# Altium PCB Temperature Monitor & Display.PcbDoc
Units mil, origin at the board's own origin, x right, y up, seen from the top; angles counter-clockwise.
Board outline 3000 x 2000 mil, 2 copper layers (Top Layer, Bottom Layer), stack 21 mil thick; 61 components, 52 nets, 265 pads, 27 vias.
Unrouted connection lines stored in the file: 114.
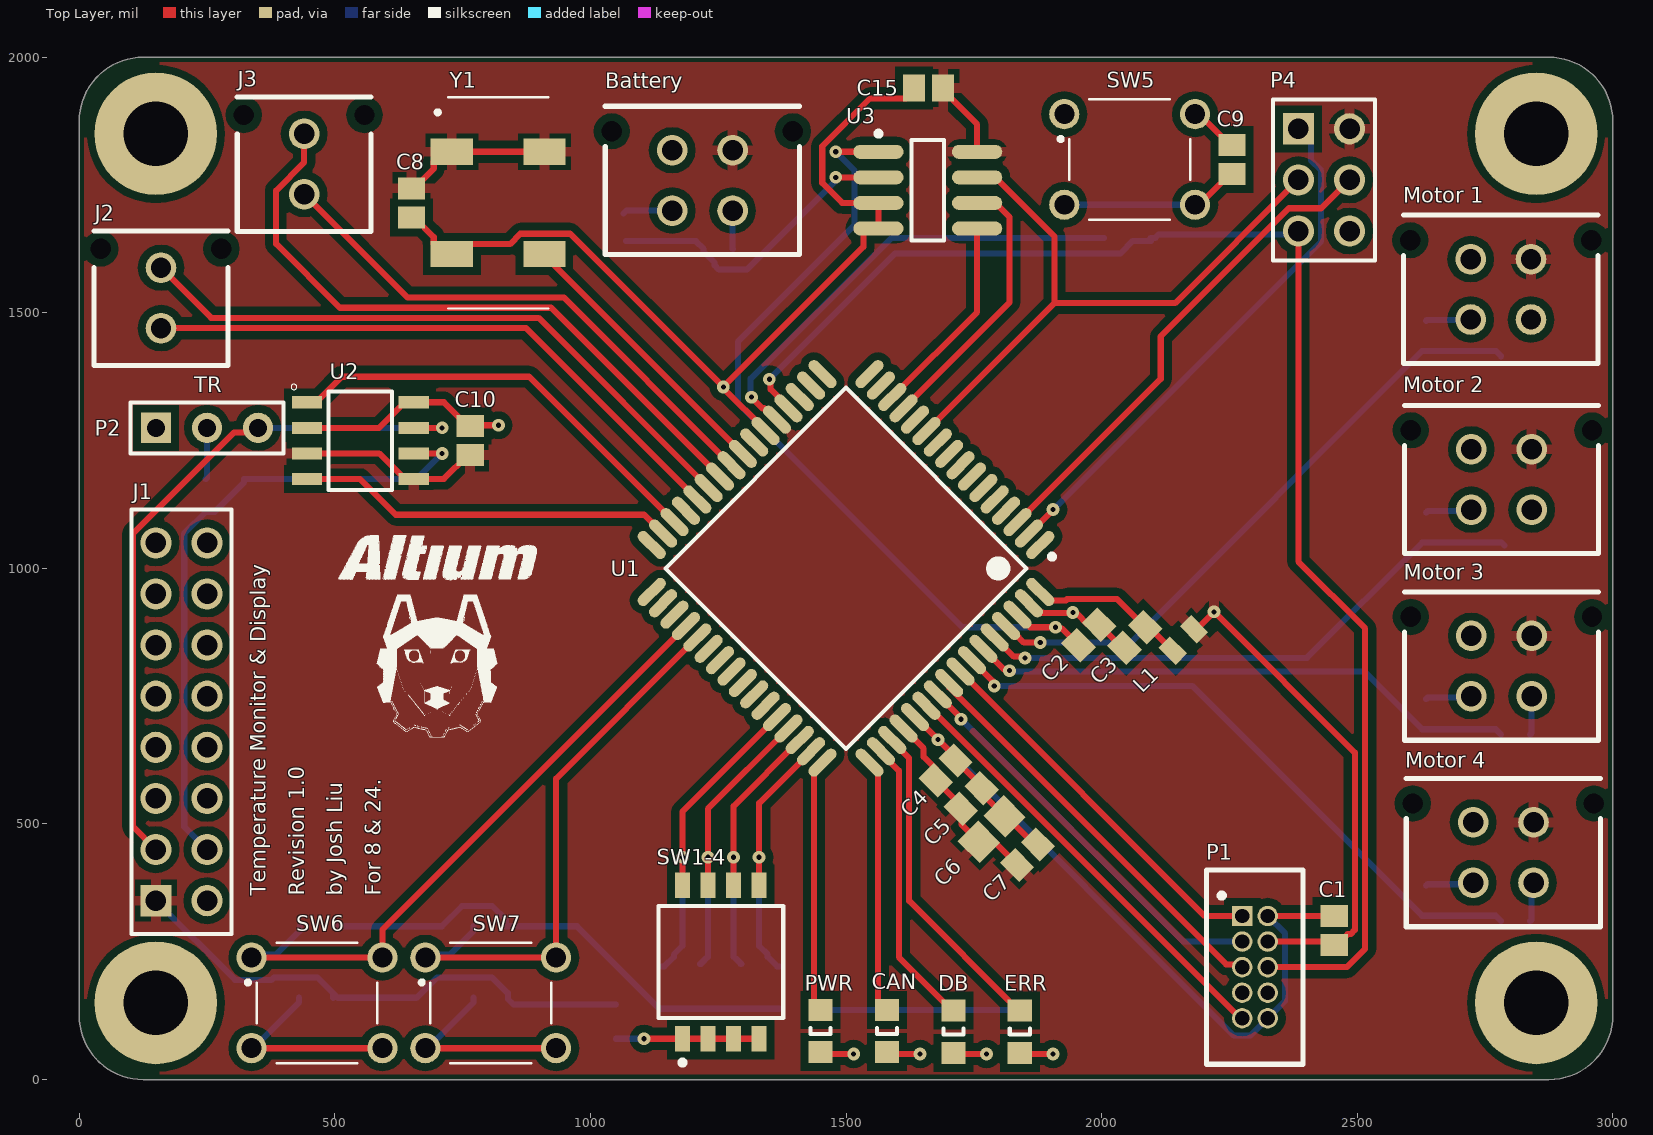
[diagram p0: Top Layer view]
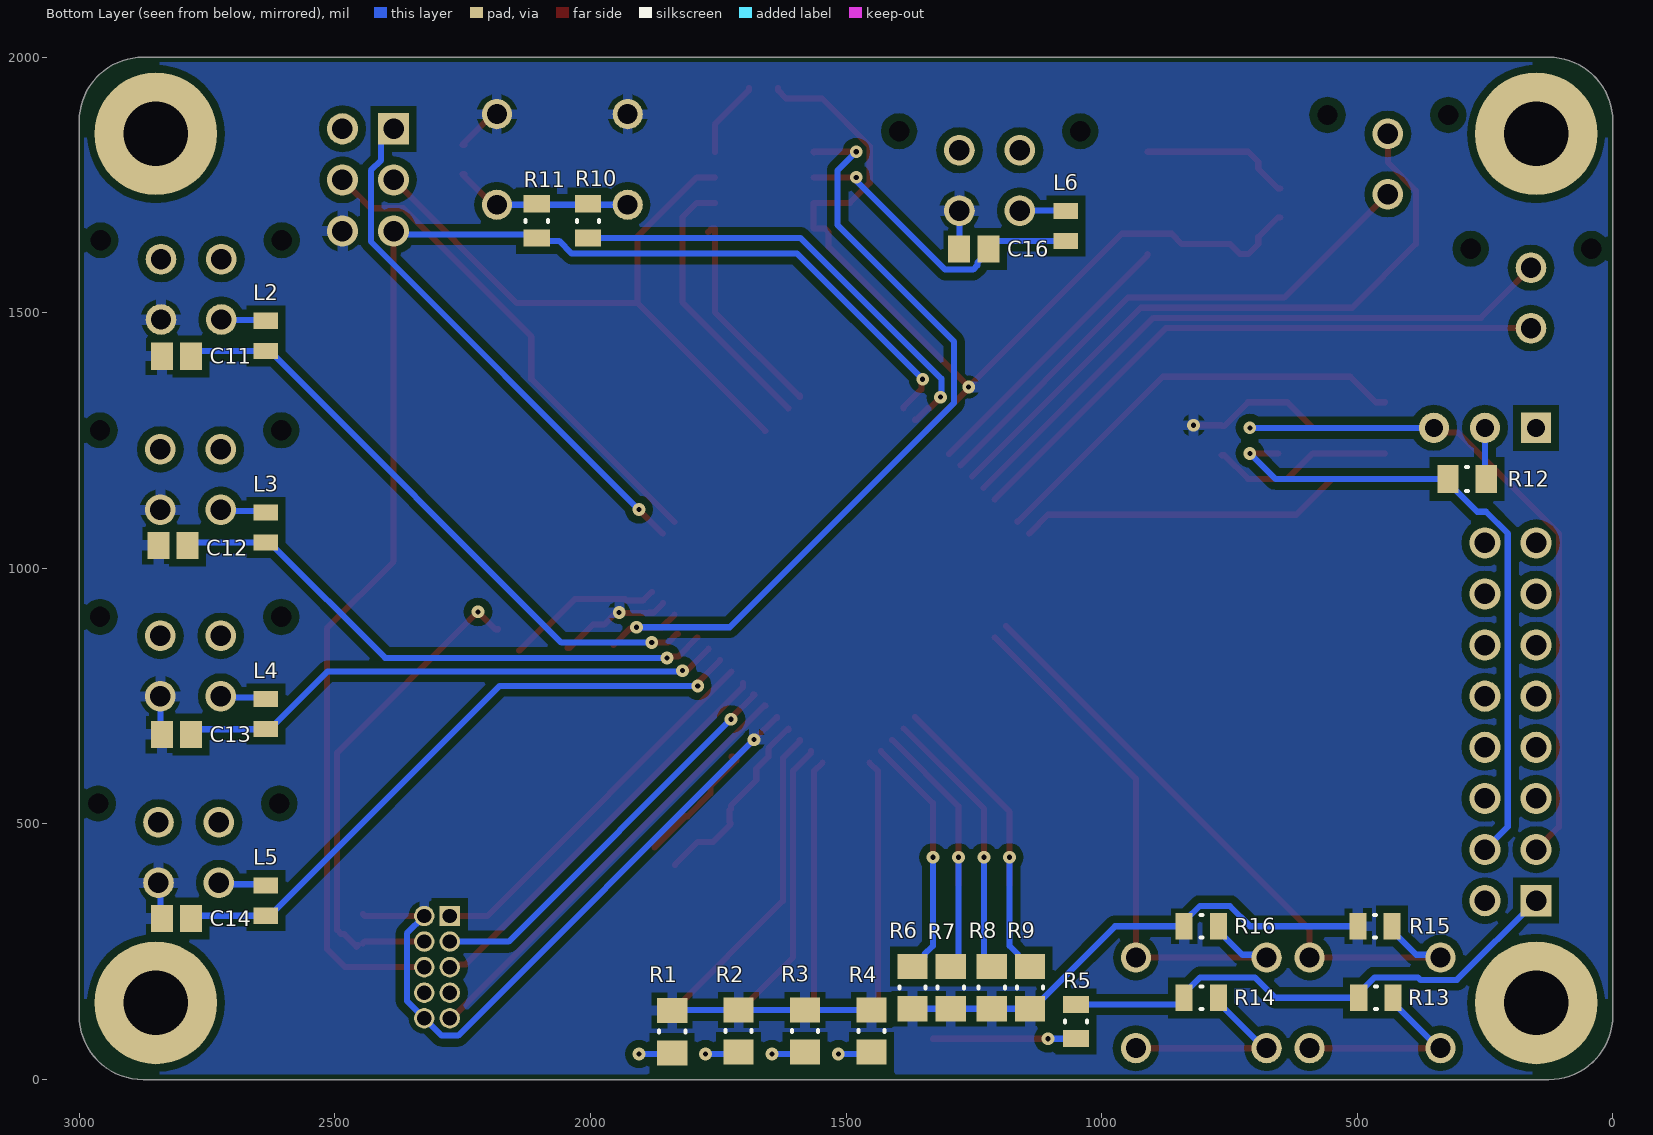
[diagram p1: Bottom Layer view, seen from below]

## Layer stack, top to bottom
Top Solder: solder mask 0.4, Solder Resist, Dk 3.5
Top Layer: signal copper 1.4
Dielectric 2: prepreg 2.8, PP-006, Dk 4.1
Dielectric 1: dielectric 12.6, FR-4, Dk 4.8
Dielectric 3: prepreg 2.8, PP-006, Dk 4.1
Bottom Layer: signal copper 1.4
Bottom Solder: solder mask 0.4, Solder Resist, Dk 3.5

## Board outline
125,0 2875,0 ccw(c2875,125) 3000,125 3000,1875 ccw(c2875,1875) 2875,2000 125.22,2000 ccw(c125,1875) 0,1875 0,125 ccw(c125,125)

## Design rules (kind name [scope] priority, off if disabled: settings)
BoardOutlineClearance [All] p1: gap=10 ignorepadtopadclearanceinfootprint=FALSE
Clearance [All] p1: gap=5 ignorepadtopadclearanceinfootprint=TRUE except(0: Arc-Hole Track-Hole SMDPad-Hole THPad-Hole Via-Hole Fill-Hole Poly-Hole Region-Hole Text-Hole; 8: Track-Track Track-SMDPad Track-THPad Track-Via; 10: Poly-Poly; 15: Arc-Poly Track-Poly SMDPad-Poly THPad-Poly Via-Poly Fill-Poly)
ComponentClearance [All] p1: gap=0 collisioncheckmode=3 verticalgap=100000 showdistances=FALSE
Height [All] p1: minheight=0 maxheight=2000 prefheight=500
HoleSize [All] p1: absolutevalues=TRUE maxlimit=200 minlimit=10 maxpercent=80.000 minpercent=20.000
MinimumAnnularRing [All] p1: minimumring=6
MinimumSolderMaskSliver [All] p1: minsoldermaskwidth=5
PlaneConnect [All] p1: planeconnectstyle=Relief reliefexpansion=20 reliefentries=4 reliefconductorwidth=20 reliefairgap=10
PolygonConnect [All] p1: connectstyle=Relief reliefconductorwidth=20 reliefentries=4 polygonreliefangle="90 Angle" airgapwidth=10
RoutingVias [All] p1: holewidth=10 width=25 viastyle="Through Hole" minholewidth=10 minwidth=25 maxholewidth=28 maxwidth=50
SilkToSolderMaskClearance [IsPad] p1: minsilkscreentomaskgap=5 clearancetoexposedcopper=TRUE
SolderMaskExpansion [All] p1: expansion=4
Width [All] p1: maxlimit=200 minlimit=5 preferedwidth=25 minimp=50.000000 maximp=50.000000 favimp=50.000000
24 further rules are at their usual default settings.

## Classes and differential pairs
component class U_TXD-RXD: J2
component class U_Reset: C9 R10 R11 SW5
component class "U_Power Supply Noise Canceller": C2 C3 C4 C5 C6 C7 L1
component class U_JTAG: C1 P1
component class U_ISCP: P4
component class "U_External ADC": Battery C15 C16 L6 U3
component class U_Display: J3
component class "U_Debug LEDs": CAN DB ERR PWR R1 R2 R3 R4
component class U_Debugger: R13 R14 R15 R16 SW6 SW7
component class U_Clock: C8 Y1
component class "U_CAN System": C10 J1 P2 R12 U2
component class "U_CAN Address Switch Array": R5 R6 R7 R8 R9 SW1-4
component class "U_Analog Input Noise Canceller": C11 C12 C13 C14 L2 L3 L4 L5 "Motor 1" "Motor 2" "Motor 3" "Motor 4"
component class "Top Level": U1

## Components (designator, comment, footprint, x,y, rotation, side; value= is the part's Value field where it differs from the comment)
Battery "Molex Micro" 0430450427 1219.06,1759.06 r180 top
C1 "0.1uF" CAPC2013X94X50LL20T25 2455,291.46 r90 top
C2 "0.1uF" CAPC2013X94X50LL20T25 1975,870 r225 top
C3 "0.1uF" CAPC2013X94X50LL20T25 2065,865 r45 top
C4 "0.01uF" CAPC2013X88X50LL20T25 1695,605 r225 top
C5 "0.1uF" CAPC2013X94X50LL20T25 1745,550 r225 top
C6 "1uF" CAPC2013X145X50ML20T25 1785,490 r225 top
C7 "10uF" CAPC2013X145X50LL20T20 1855,440 r225 top
C8 "0.1uF" CAPC2013X94X50LL20T25 650,1715 r270 top
C9 "0.1uF" CAPC2013X94X50LL20T25 2255,1800 r270 top
C10 "0.1uF" CAPC2013X94X50LL20T25 765,1250 r270 top
C11 "0.1uF" CAPC2013X94X50LL20T25 2810,1415 r180 bottom
C12 "0.1uF" CAPC2013X94X50LL20T25 2816.46,1045 r180 bottom
C13 "0.1uF" CAPC2013X94X50LL20T25 2810,675 r180 bottom
C14 "0.1uF" CAPC2013X94X50LL20T25 2810,315 r180 bottom
C15 "0.1uF" CAPC2013X94X50LL20T25 1661.46,1940 r0 top
C16 "0.1uF" CAPC2013X94X50LL20T25 1250,1625 r180 bottom
CAN "150080BS75000" 0805_A 1580,95 r90 top
DB "150080GS75000" 0805_A 1710,93.66 r90 top
ERR "150080RS75000" 0805_A 1840,93.66 r90 top
J1 "SSQ-108-02-G-D" SMTC-SSQ-108-02-X-D 150,350 r90 top
J2 "Molex micro-" 0430450227 160,1470 r0 top
J3 "Molex micro-" 0430450227 440,1731.89 r0 top
L1 "10uH" TDK-IND0805-125_V 2160,860 r225 top
L2 "10uH" TDK-IND0805-125_V 2635,1455 r90 bottom
L3 "10uH" TDK-IND0805-125_V 2635,1080 r90 bottom
L4 "10uH" TDK-IND0805-125_V 2635,715 r90 bottom
L5 "10uH" TDK-IND0805-125_V 2635,350 r90 bottom
L6 "10uH" TDK-IND0805-125_V 1070,1670 r270 bottom
"Motor 1" "Molex Micro" 0430450427 2780.94,1545.94 r180 top
"Motor 2" "Molex Micro" 0430450427 2782.17,1173.94 r180 top
"Motor 3" "Molex Micro" 0430450427 2782.17,808.94 r180 top
"Motor 4" "Molex Micro" 0430450427 2785.94,444.06 r180 top
P1 "SAMTEC-FTSH-105-01-X-D" SAMTEC-FTSH-105-01-X-D 2183.23,415.28 r270 top
P2 "Header 3" HDR1X3 150,1275 r0 top
P4 "TSW-103-08-L-D" SMTC-TSW-103-08-X-D 2385,1860 r270 top
PWR "150080YS75000" 0805_A 1450,95 r90 top
R1 "560R" RESC0805(2012)_M 1840,93.66 r90 bottom value="560.00 Ohm"
R2 "560R" RESC0805(2012)_M 1710,95 r90 bottom value="560.00 Ohm"
R3 "560R" RESC0805(2012)_M 1580,95 r90 bottom value="560.00 Ohm"
R4 "560R" RESC0805(2012)_M 1450,95 r90 bottom value="560.00 Ohm"
R5 "100R" RESC0805(2012)_L 1050,113.46 r90 bottom value="100.00 Ohm"
R6 "1K" RESC0805(2012)_M 1370,180 r90 bottom value="1000.00 Ohm"
R7 "1K" RESC0805(2012)_M 1295,180 r90 bottom value="1000.00 Ohm"
R8 "1K" RESC0805(2012)_M 1215,180 r90 bottom value="1000.00 Ohm"
R9 "1K" RESC0805(2012)_M 1140,180 r90 bottom value="1000.00 Ohm"
R10 "10K" RESC0805(2012)_L 2005,1680 r270 bottom value="10200.00 Ohm"
R11 "100R" RESC0805(2012)_L 2105,1680 r270 bottom value="100.00 Ohm"
R12 "120R" RESC0805(2012)_N 285,1175 r0 bottom value="120.00 Ohm"
R13 "100R" RESC0805(2012)_L 463.46,160 r180 bottom value="100.00 Ohm"
R14 "100R" RESC0805(2012)_L 805,160 r180 bottom value="100.00 Ohm"
R15 "10K" RESC0805(2012)_L 465,300 r0 bottom value="10200.00 Ohm"
R16 "10K" RESC0805(2012)_L 805,300 r180 bottom value="10200.00 Ohm"
SW1-4 "TDA04H0SB1" CKCP-TDA04H0SB1R_V 1255,230 r90 top
SW5 "1825910-7" "Switch 6mm 24V (NO)" 2055,1800 r0 top
SW6 "1825910-7" "Switch 6mm 24V (NO)" 465,150 r0 top
SW7 "1825910-7" "Switch 6mm 24V (NO)" 805,150 r0 top
U1 "AT90CAN32-16AU" 64A_N 1500,1000 r225 top
U2 "MCP2562-E/SN" SOIC127P600X175-8N 550,1250 r0 top
U3 "MCP3001-I/SN" SOIC-SN8_M 1660,1740 r0 top
Y1 "SG-636PCW_50.0000MC3__ROHS" SG-636 819.45,1715 r270 top

## Footprints (in the part's own frame and the unit in brackets; to place one, negate y for a bottom-side part, rotate by r counter-clockwise, add the part's x,y. Pads: shape width x height; smd on the part's side, far side on the other; paste and mask are expansions set on the pad)
64A_N [mm] "Thin QFP, 64-Leads, Body 14x14mm, Pitch 0.8mm, IPC Medium Density"
  oval 1.75x0.55 smd: 1(-7.65,6) 2(-7.65,5.2) 3(-7.65,4.4) 4(-7.65,3.6) 5(-7.65,2.8) 6(-7.65,2) 7(-7.65,1.2) 8(-7.65,0.4) 9(-7.65,-0.4) 10(-7.65,-1.2) 11(-7.65,-2) 12(-7.65,-2.8) 13(-7.65,-3.6) 14(-7.65,-4.4) 15(-7.65,-5.2) 16(-7.65,-6) 33(7.65,-6) 34(7.65,-5.2) 35(7.65,-4.4) 36(7.65,-3.6) 37(7.65,-2.8) 38(7.65,-2) 39(7.65,-1.2) 40(7.65,-0.4) 41(7.65,0.4) 42(7.65,1.2) 43(7.65,2) 44(7.65,2.8) 45(7.65,3.6) 46(7.65,4.4) 47(7.65,5.2) 48(7.65,6)
  oval 0.55x1.75 smd: 17(-6,-7.65) 18(-5.2,-7.65) 19(-4.4,-7.65) 20(-3.6,-7.65) 21(-2.8,-7.65) 22(-2,-7.65) 23(-1.2,-7.65) 24(-0.4,-7.65) 25(0.4,-7.65) 26(1.2,-7.65) 27(2,-7.65) 28(2.8,-7.65) 29(3.6,-7.65) 30(4.4,-7.65) 31(5.2,-7.65) 32(6,-7.65) 49(6,7.65) 50(5.2,7.65) 51(4.4,7.65) 52(3.6,7.65) 53(2.8,7.65) 54(2,7.65) 55(1.2,7.65) 56(0.4,7.65) 57(-0.4,7.65) 58(-1.2,7.65) 59(-2,7.65) 60(-2.8,7.65) 61(-3.6,7.65) 62(-4.4,7.65) 63(-5.2,7.65) 64(-6,7.65)
  silkscreen extent -7.77,-6.35 6.35,6.95, body extent -7,-7 7,7, height 1.6
0805_A [mm] "Chip LED, 2-Leads, Body 2.0x1.3mm, IPC Medium Density"
  rect 1.1x1.2 smd: 1(-1.05,0) 2(1.05,0)
  silkscreen extent -0.15,-0.5 0.15,0.5, body extent -1,-0.62 1,0.63, height 0.68
0430450227 [mil] "Molex Micro fit 3.0"
  round 60 hole 40: 1(0,0) 2(0,118.11)
  round 0 hole 40 unplated: ""(-118.11,155.12) ""(118.11,155.12)
  silkscreen extent -131,-73 131,190
0430450427 [mil] "Molex micro-fit 3.0 4 pos"
  round 60 hole 40: 1(-59.06,59.06) 2(-59.06,-59.06) 3(59.06,59.06) 4(59.06,-59.06)
  round 0 hole 40 unplated: 7(177.17,-96.06) ""(-177.17,-96.06)
  silkscreen extent -190,-145 190,145
CAPC2013X88X50LL20T25 [mm] "Chip Capacitor, 2-Leads, Body 2.2x1.45mm, IPC High Density"
  rect 1.067x1.35 smd: 1(-0.7,0) 2(0.7,0)
  body extent -1.1,-0.72 1.1,0.73, height 0.88
CAPC2013X94X50LL20T25 [mm] "Chip Capacitor, 2-Leads, Body 2.21x1.45mm, IPC High Density"
  rect 1.092x1.35 smd: 1(-0.725,0) 2(0.725,0)
  body extent -1.1,-0.72 1.1,0.72, height 0.94
CAPC2013X145X50LL20T20 [mm] "Chip Capacitor, 2-Leads, Body 2.00x1.25mm, IPC High Density"
  rect 1.05x1.35 smd: 1(-0.725,0) 2(0.725,0)
  body extent -1.1,-0.72 1.1,0.72, height 1.45
CAPC2013X145X50ML20T25 [mm] "Chip Capacitor, 2-Leads, Body 2.00x1.25mm, IPC Low Density"
  rect 1.448x1.55 smd: 1(-0.9,0) 2(0.9,0)
  body extent -1.1,-0.72 1.1,0.72, height 1.45
CKCP-TDA04H0SB1R_V [mm] "SMD, 8-Leads, Body 6.21x6.2mm, Pitch 1.27mm"
  rect 1.27x0.76 smd: 1(-3.81,1.905) 2(-3.81,0.635) 3(-3.81,-0.635) 4(-3.81,-1.905) 5(3.81,-1.905) 6(3.81,-0.635) 7(3.81,0.635) 8(3.81,1.905)
  silkscreen extent -5.12,-3.11 2.78,3.11, body extent -4.06,-3.1 4.06,3.11, height 2.3
HDR1X3 [mm] "Connector; Header; 3 Position"
  rect 1.5x1.5 hole 0.9: 1(0,0)
  round 1.5 hole 0.9: 2(2.54,0) 3(5.08,0)
  silkscreen extent -1.27,-1.27 6.35,1.27
RESC0805(2012)_L [mm] "Chip Resistor, Body 2.0x1.3mm, IPC High Density"
  rect 0.85x1.3 smd: 1(-0.85,0) 2(0.85,0)
  silkscreen extent -0.05,-0.55 0.05,0.55, body extent -1.1,-0.67 1.1,0.68, height 0.7
RESC0805(2012)_M [mm] "Chip Resistor, Body 2.0x1.3mm, IPC Low Density"
  rect 1.25x1.5 smd: 1(-1.05,0) 2(1.05,0)
  silkscreen extent -0.05,-0.65 0.05,0.65, body extent -1.1,-0.67 1.1,0.67, height 0.7
RESC0805(2012)_N [mm] "Chip Resistor, Body 2.0x1.3mm, IPC Medium Density"
  rect 1.05x1.4 smd: 1(-0.95,0) 2(0.95,0)
  silkscreen extent -0.05,-0.6 0.05,0.6, body extent -1.1,-0.67 1.1,0.68, height 0.7
SAMTEC-FTSH-105-01-X-D [mil]
  rect 40x40 hole 28 mask+3: 1(95.28,91.77)
  round 40 hole 28 mask+3: 2(95.28,141.77) 3(145.28,91.77) 4(145.28,141.77) 5(195.28,91.77) 6(195.28,141.77) 7(245.28,91.77) 8(245.28,141.77) 9(295.28,91.77) 10(295.28,141.77)
  silkscreen extent 5,22 385,211
SG-636 [mm]
  rect 1.3x2.1 smd: 1(-2.54,-2.3) 2(2.54,-2.3) 3(2.54,2.3) 4(-2.54,2.3)
  silkscreen extent -5.25,-3.1 5.25,2.5
SMTC-SSQ-108-02-X-D [mm] "SQ Post Socket, 2x8 Pins, Vertical, 2.54mm Pitch, Female"
  rect 1.55x1.55 hole 1.02: 1(0,0)
  round 1.55 hole 1.02: 2(0,-2.54) 3(2.54,0) 4(2.54,-2.54) 5(5.08,0) 6(5.08,-2.54) 7(7.62,0) 8(7.62,-2.54) 9(10.16,0) 10(10.16,-2.54) 11(12.7,0) 12(12.7,-2.54) 13(15.24,0) 14(15.24,-2.54) 15(17.78,0) 16(17.78,-2.54)
  silkscreen extent -1.65,-3.74 19.43,1.2, body extent -1.52,-3.75 19.3,1.21, height 8.51
SMTC-TSW-103-08-X-D [mm] ".025 SQ Post Terminal Strip Assembly, 2x3 Pins, Vertical, 2.54mm Pitch, Male"
  rect 1.55x1.55 hole 1.02: 1(0,0)
  round 1.55 hole 1.02: 2(0,2.54) 3(2.54,0) 4(2.54,2.54) 5(5.08,0) 6(5.08,2.54)
  silkscreen extent -1.46,-1.27 6.54,3.81, body extent -1.27,-1.27 6.35,3.81, height 8.38
SOIC127P600X175-8N [mm]
  rect 1.5x0.6 smd: 1(-2.65,1.905) 2(-2.65,0.635) 3(-2.65,-0.635) 4(-2.65,-1.905) 5(2.65,-1.905) 6(2.65,-0.635) 7(2.65,0.635) 8(2.65,1.905)
  silkscreen extent -3.44,-2.45 1.58,2.81
SOIC-SN8_M [mm] "SOIC, 8-Leads, Body 4.9x3.9mm, Pitch 1.27mm, IPC Low Density"
  oval 2.5x0.7 smd: 1(-2.45,1.905) 2(-2.45,0.635) 3(-2.45,-0.635) 4(-2.45,-1.905) 5(2.45,-1.905) 6(2.45,-0.635) 7(2.45,0.635) 8(2.45,1.905)
  silkscreen extent -2.57,-2.5 0.8,2.93, body extent -2,-2.5 2,2.5, height 1.75
"Switch 6mm 24V (NO)" [mm]
  round 1.498 hole 0.99: 1(-3.25,2.25) 2(3.25,2.25) 3(-3.25,-2.25) 4(3.25,-2.25)
  silkscreen extent -3.53,-3 3,3
TDK-IND0805-125_V [mm] "Chip Inductor, 2-Leads, Body 2.0x1.2mm, Height 1.25mm"
  rect 0.8x1.2 smd: 1(-0.75,0) 2(0.75,0)
  body extent -1.1,-0.7 1.1,0.7, height 1.25

## Part data
Battery "Motor 1" "Motor 2" "Motor 3" "Motor 4": library part "Molex micro-fit 4-pin (dual row schematic)", "Molex micro-fit 3.0, P/N 0430450427"
C1 C2 C3 C5 C8 C9 C10 C11 C12 C13 C14 C15 C16: library part CMP-2000-05808-1, "Chip Capacitor, 0.1 uF, +/- 5%, 50 V, -55 to 125 degC, 0805 (2012 Metric), RoHS, Tape and Reel", Capacitance - nF=100nF, Capacitance - pF=100000pF, Case Code - in=0805, Case Code - mm=2012, Case Height=0.94mm, Case Length=2.01mm, Case Width=1.25mm, Dielectric=X7R, Manufacturer=AVX, Maximum Operating Temperature=+125C, Minimum Operating Temperature=-55C, Operating Temperature Range=-55Cto+125C, Package / Case=0805(2012metric), Package Description="2-Pin Surface Mount Device, Body 2.01 x 1.25 mm", Temperature Coefficient / Code=+/-15%, Tolerance=5%, Voltage Rating=50V, Brand=AVX, Capacitance=0.1uF, Datasheet URL=http://www.farnell.com/datasheets/1679506.pdf, Datasheet Version=11/2012, Dimensions=1.25mmWx2.01mmLx0.94mmH, Dissipation Factor DF=2.5, Factory Pack Quantity=4000, Manufacturer URL=http://www.avx.com/, Mounting Technology=SurfaceMount, Package Reference=0805, Packaging=Reel, Product=GeneralTypeMLCCs, Product Category=MultilayerCeramicCapacitorsMLCC-SMD/SMT, RoHS=Details, Termination Style=SMD/SMT, Type=StandardX7RMLCCs, Voltage Rating DC=50V
C4: library part CMP-2000-05989-1, "Chip Capacitor, 0.01 uF, +/- 10%, 50 V, -55 to 125 degC, 0805 (2012 Metric), RoHS, Tape and Reel", Capacitance - nF=10nF, Capacitance - pF=10000pF, Case Code - in=0805, Case Code - mm=2012, Case Height=0.78mm, Case Length=2mm, Case Width=1.2mm, Dielectric=X7R, Manufacturer=Kemet, Maximum Operating Temperature=+125C, Minimum Operating Temperature=-55C, Operating Temperature Range=-55Cto+125C, Package / Case=0805(2012metric), Package Description="2-Pin Surface Mount Device, Body 2 x 1.25 mm", Temperature Coefficient / Code=+/-15%, Tolerance=10%, Voltage Rating=50V, =C0805C103K5RAC7800, Brand=Kemet, Capacitance=0.01uF, Class=Class1, Datasheet URL=http://capacitoredge.kemet.com/capedge2/DataSheet/Datasheet-C0805C103K5RAC.pdf?pn=C0805C103K5RAC{BULK}, Datasheet Version=10/2016, Dimensions=1.2mmWx2mmLx0.78mmH, Dissipation Factor DF=2.5, Factory Pack Quantity=4000, Lead Spacing=0.75mm, Manufacturer URL=http://www.kemet.com/, Mounting Technology=SurfaceMount, Package Reference=0805, Packaging=Reel, Product=GeneralTypeMLCCs, Product Category=MultilayerCeramicCapacitorsMLCC-SMD/SMT, RoHS=Details, Series=C0805C, Termination Style=SMD/SMT, Type=SMDMLCCX7R6.3-250VDCCommericalGrade, Voltage Rating DC=50V
C6: library part CMP-2100-03605-1, "Chip Capacitor, 1 uF, 25 V, 10%, -55 to 125 degC, 0805 (2012 Metric), RoHS, Tape and Reel", Case/Package=0805, Case Code (Metric)=2012, Dielectric=X7R, Manufacturer=Yageo, Max Operating Temperature=125degC, Min Operating Temperature=-55degC, Package Description="2-Pin Surface Mount Device, Body 2 x 1.25 mm", Package Quantity=3000, Tolerance=10%, Voltage Rating=25V, Capacitance=1uF, Case Code (Imperial)=0805, Composition=Ceramic, Datasheet URL=http://www.yageo.com/documents/recent/UPY-GPHC_X7R_6.3V-to-50V_15.pdf, Datasheet Version="Rev. 15, 10/2016", Depth=1.25mm, Dissipation Factor=5%, Height=1.25mm, Lead Free=LeadFree, Length=2mm, Manufacturer URL=http://www.yageo.com/, Mount=SurfaceMount, Number of Pins=2, Package Reference=0805, Packaging=TapeandReel, Radiation Hardening=No, REACH SVHC=NoSVHC, RoHSCompliant=True, Termination=SMD/SMT, Thickness=0.057inch, Voltage Rating (DC)=25V, Width=0.049inch
C7: library part CMP-2000-07390-1, "Chip Capacitor, 10 uF, +/- 10%, 10 V, -55 to 85 degC, 0805 (2012 Metric), RoHS, Tape and Reel", Case Code - in=0805, Case Code - mm=2012, Dielectric=X5R, Manufacturer=Vishay, Maximum Operating Temperature=+85C, Minimum Operating Temperature=-55C, Package / Case=0805(2012metric), Package Description="2-Pin Surface Mount Device, Body 2.00 x 1.25 mm", Tolerance=10%, Voltage Rating DC=10VDC, Brand=Vishay/Vitramon, Capacitance=10uF, Datasheet URL=http://www.vishay.com/docs/28548/vjw1bcbascomseries.pdf, Datasheet Version=07/2016, Factory Pack Quantity=3000, Height=1.25mm, Length=2mm, Manufacturer URL=http://www.vishay.com/, Mounting Technology=SurfaceMount, Package Reference=0805, Packaging=Reel, Product Category=MultilayerCeramicCapacitorsMLCC-SMD/SMT, RoHS=True, Series=VJW1BC, Termination Style=SMD/SMT, Unit Weight=0.000194oz, Width=1.25mm
CAN: library part CMP-1426-00008-1, "SMD mono-color Chip LED, WL-SMCW, Blue", Color=Blue, Manufacturer="Wuerth Elektronik", ComponentLink1Description="Manufacturer URL", ComponentLink1URL=http://www.we-online.com, ComponentLink2Description=Datasheet, ComponentLink2URL=http://katalog.we-online.com/led/datasheet/150080BS75000.pdf, PackageReference=0805_A, PartNumber=150080BS75000
DB: library part CMP-1426-00007-1, "SMD mono-color Chip LED, WL-SMCW, Green", Color=Green, Manufacturer="Wuerth Elektronik", ComponentLink1Description="Manufacturer URL", ComponentLink1URL=http://www.we-online.com, ComponentLink2Description=Datasheet, ComponentLink2URL=http://katalog.we-online.com/led/datasheet/150080GS75000.pdf, PackageReference=0805_A, PartNumber=150080GS75000
ERR: library part CMP-1426-00011-1, "SMD mono-color Chip LED, WL-SMCW, Red", Color=Red, Manufacturer="Wuerth Elektronik", ComponentLink1Description="Manufacturer URL", ComponentLink1URL=http://www.we-online.com, ComponentLink2Description=Datasheet, ComponentLink2URL=http://katalog.we-online.com/led/datasheet/150080RS75000.pdf, PackageReference=0805_A, PartNumber=150080RS75000
J1: library part CMP-1023-00300-1, "SQ Post Socket, Through-hole, Vertical, -55 to 125 degC, 2.54 mm Pitch, 16-Pin, Female, RoHS", Manufacturer=Samtec, Temperature Range="-55 to 125 degC", ComponentLink1Description="Manufacturer URL", ComponentLink1URL=http://www.samtec.com, ComponentLink2Description=Datasheet, ComponentLink2URL=http://www.samtec.com/documents/webfiles/pdf/SSQ_TH.PDF, ComponentLink3Description="Package Specification", ComponentLink3URL=http://www.samtec.com/documents/webfiles/cpdf/SSQ-1XX-XX-XXX-X-XX-XXX-XX-X-MKT.pdf, DatasheetVersion=F-214, Mounting Technology=Through-hole, Orientation=Vertical, PackageDescription="Assembly, Socket Strip .025[0.64] SQ Tail", PackageReference=SSQ-108-02-X-D, PackageVersion="BD, 6/1987", PartNumber=SSQ-108-02-G-D, Pitch="2.54 mm", RoHS=True
J2 J3: library part "Molex micro-fit 2-pin", "Molex micro-fit 3.0. Molex P/N 0430450227"
L1 L2 L3 L4 L5 L6: library part CMP-0266-00001-1, "Multilayer Inductor, 10 uH, ±20%, 300 mOhm, 50MHz, 0805(2012)", DC Resistance="0.3 Ohm", PartNumber=MLZ2012N100LT, ComponentLink1Description="Manufacturer URL", ComponentLink1URL=http://www.global.tdk.com/, ComponentLink2Description=Datasheet, ComponentLink2URL=http://www.tdk.co.jp/tcfx01/c533_mlz.pdf, DatasheetVersion=05/2013, Mounting Technology="Suface Mount", PackageDescription="2-Pin SMT Inductor, 2 x 1.25 mm Body", PackageReference=IND0805-125
P2: "Header, 3-Pin", LatestRevisionDate=17-Jul-2002, LatestRevisionNote="Re-released for DXP Platform.", Publisher="Altium Limited"
P4: library part CMP-1024-00336-1, "0.025\" SQ Post Header, Through-hole, Vertical, -55 to 125 degC, 2.54 mm Pitch, 6-Pin, Male, RoHS", Manufacturer=Samtec, Temperature Range="-55 to 125 degC", ComponentLink1Description="Manufacturer URL", ComponentLink1URL=http://www.samtec.com, ComponentLink2Description=Datasheet, ComponentLink2URL=http://www.samtec.com/documents/webfiles/pdf/TSW_TH.PDF, ComponentLink3Description="Package Specification", ComponentLink3URL=http://www.samtec.com/documents/webfiles/cpdf/TSW-XXX-XX-XXX-X-XX-XXX-MKT.pdf, DatasheetVersion=F-214, Mounting Technology=Through-hole, Orientation=Vertical, PackageDescription=".025[0.64] SQ. Post Terminal Strip Assembly", PackageReference=TSW-103-08-X-D, PackageVersion="DM, 8/1988", PartNumber=TSW-103-08-L-D, Pitch="2.54 mm", RoHS=True
PWR: library part CMP-1426-00012-1, "SMD mono-color Chip LED, WL-SMCW, Yellow", Color=Yellow, Manufacturer="Wuerth Elektronik", ComponentLink1Description="Manufacturer URL", ComponentLink1URL=http://www.we-online.com, ComponentLink2Description=Datasheet, ComponentLink2URL=http://katalog.we-online.com/led/datasheet/150080YS75000.pdf, PackageReference=0805_A, PartNumber=150080YS75000
R1 R2 R3 R4: library part CMP-1013-00482-1, "560R 0.125W 1% 0805 (2012 Metric)  SMD", Case-EIA=0805, Case-Metric=2012, Power="0.125 W", Tolerance="1 %", Technology=SMT
R5 R11 R13 R14: library part CMP-1013-00397-1, "100R 0.125W 1% 0805 (2012 Metric)  SMD", Case-EIA=0805, Case-Metric=2012, Power="0.125 W", Tolerance="1 %", Technology=SMT
R6 R7 R8 R9: library part CMP-1013-00510-1, "1K 0.125W 1% 0805 (2012 Metric)  SMD", Case-EIA=0805, Case-Metric=2012, Power="0.125 W", Tolerance="1 %", Technology=SMT
R10 R15 R16: library part CMP-1013-00624-1, "10K2 0.125W 1% 0805 (2012 Metric)  SMD", Case-EIA=0805, Case-Metric=2012, Power="0.125 W", Tolerance="1 %", Technology=SMT
R12: library part "120R 5% 0805", "120R 0.125W 5% 0805 (2012 Metric)  SMD", Case-EIA=0805, Case-Metric=2012, Power="0.125 W", Tolerance="5 %", Technology=SMT
SW1-4: library part "SMD Half-Pitch Dip Switch Array", "Ultra-Miniature Surface Mount Half-Pitch DIP Switch, 25 mA, 24 V, -40 to 85 degC, 8-Pin SMD, RoHS, Tube", Case\Package=DIP, Contact Current Rating="100 mA", Max Contact Resistance="100 mohm", Max Current Rating="25 mA", Max Operating Temperature="85 degC", Max Voltage Rating (DC)="24 V", Min Operating Temperature="-40 degC", Package Quantity=70, ComponentLink1Description=Datasheet, ComponentLink1URL=http://www.ck-components.com/media/1328/tda.pdf, Contact Finish=Gold, Contact Material=Copper, Contact Plating=Gold, Current Rating="100 mA", DatasheetVersion=02/2016, Height="2.3 mm", Lead Pitch="1.27 mm", Length="6.21 mm", Mount="Surface Mount", Mounting Technology="Surface Mount", PackageDescription="8-Pin Surface Mount Device, Body 6.21 x 6.2 mm, Pitch 1.27 mm", PackageReference=TDA04H0SB1R, Packaging=Rail/Tube, Pins=4, Radiation Hardening=No, REACH SVHC="No SVHC", RoHSCompliant=true, Throw Configuration=SPST, Voltage Rating (DC)="24 V"
SW5 SW6 SW7: library part "Switch 6mm 24V (NO)", "FSM4JAH=6MM TACT SWITCH, HIGH TEMP", Contact_Current_Rating="50 mA", Package=None, Configuration_Pole-Throw="Single Pole - Single Throw", Digi-Key_Part_Number=450-1804-ND, Digi-Key_Purchase_URL=https://www.digikey.com/product-detail/en/te-connectivity-alcoswitch-switches/1825910-7/450-1804-ND/1731414?utm_source=snapeda&utm_medium=aggregator&utm_campaign=symbol, EU_RoHS_Compliance=Compliant, MF="TE Connectivity", MP=1825910-7, SnapEDA_Link=https://www.snapeda.com/parts/1825910-7/TE%20Connectivity%20ALCOSWITCH%20Switches/view-part/?ref=snap, TE_purchase_URL=https://www.te.com/usa-en/product-1825910-7.html?te_bu=Cor&te_type=disp&te_campaign=seda_glo_cor-seda-global-disp-prtnr-fy19-seda-model-bom-cta_sma-317_1&elqCampaignId=32493
U1: library part CMP-0096-00116-2, "8-bit AVR Microcontroller, 32KB Flash and CAN Controller, 53 GPIO pins, Industrial Grade (-40° to +85°C), 64-pin LQFP, Green", Code_JEDEC=MS-026-AEB, ComponentLink1Description="Manufacturer URL", ComponentLink1URL=http://www.atmel.com/, ComponentLink2Description="AT90CAN32/64/128 Datasheet", ComponentLink2URL=http://www.atmel.com/dyn/resources/prod_documents/doc7679.pdf, ComponentLink3Description="AT90CAN32/64/128 Summary", ComponentLink3URL=http://www.atmel.com/dyn/resources/prod_documents/7679S.pdf, DatasheetVersion="revH, Aug-2008", PackageDescription="64-Pin Plastic Thin Profile Quad Flat Pack, 14 x 14 x 1.0 mm Body, 0.8 mm Pitch (TQFP)", PackageReference=64A, PackageVersion="revC, Oct-2010", RevisionNote="PackageVersion updated. URLs added."
U2: "Microchip MCP2562-E/SN, CAN Transceiver 1MBps 1-channel IEC 61000-4-2, 8-Pin SOIC", Package="SO-8 Microchip", Availability=Unavailable, MF=Microchip, MP=MCP2562-E/SN, Price=None, SnapEDA_Link=https://www.snapeda.com/parts/MCP2562-E/SN/Microchip/view-part/?ref=snap
U3: library part CMP-0188-00515-1, "2.7V 10-Bit A/D Converter with SPI Serial Interface, 8-Pin SOIC 150mil, Industrial Temperature", Code_IPC=SOIC127P600-8, Code_JEDEC=MS-012, DatasheetVersion="revC, Jan-2007", PackageDescription="8-Lead Plastic Small Outline (SN) - Narrow, 3.90mm Body [SOIC]", PackageReference=SOIC-SN8, PackageVersion="revBB, Aug-2009"
Y1: library part SG-636, "Standard Clock Oscillators 50MHz 3.3Volt 100ppm -20C +70C", Arrow Part Number="SG-636PCW 50.0000MC3: ROHS", Manufacturer_Name="Epson Timing", Datasheet Link=http://www.mouser.com/ds/2/137/G-636PCE_en-1003252.pdf, Manufacturer_Part_Number="SG-636PCW 50.0000MC3: ROHS"

## Free pads (board coordinates)
  round 240 hole 126: 1(150,1850) 2(2850,1850) 3(2850,150) 4(150,150)

## Via types
v1: diameter 25, hole 10, Top Layer to Bottom Layer, 27 vias

## Nets (pads, with @x,y where several pads share a name; then routed paths per layer and width w, separated by ;. In a path a pad name is that pad's centre, name@x,y a point inside that pad or via, vN(x,y) a via of type N, cw(c..) or ccw(c..) an arc to the next point about the centre after c; other vN are vias at no path point)
+5: "Motor 1.2" "Motor 2.2" "Motor 3.2" "Motor 4.2" Battery.2 C1.1 C4.2 C5.2 C6.2 C7.2 C8.1 C10.2 C15.2 J1.1 L1.1 P1.4 P4.2 R5.2 R10.2 R13.1 R14.1 U1.21 U1.52 U2.3 U2.5 U3.8 Y1.1 Y1.4 | length 4100.6
  Top Layer w12: U2.3 586.61,1225 636.61,1175 U2.5 713.47,1175 759.93,1221.46 C10.2 ; C8.1 655.07,1743.54 693.56,1782.03 693.56,1795.41 713.15,1815 Y1.1 Y1.4 ; v1(1315,1335) 1336.57,1313.43 1339.85,1313.43 1362.37,1290.92 U1.21 ; U1.52@1612.75,684.2 U1.52 1651.67,647.89 1651.67,631.5 1675.51,607.65 C4.2 1724.82,536.21 C5.2 1727.6,527.03 1727.6,503.5 1725.64,501.54 1725.64,499.25 C6.2 1789.69,464.95 C7.2 ; C15.2 1690,1934.93 1756.46,1868.47 U3.8 ; L1.1 2185.88,880.88 v1(2220,915) 2495.57,639.43 2495.57,292.7 2487.37,284.5 2481.66,284.5 2460.07,262.91 C1.1 C1.1@2457.91,260 ; P1.4 2441.46,270 C1.1@2445,266.46
  Bottom Layer w12: J1.1 304.91,195.09 376.47,195.09 380.97,199.59 466.2,199.59 496.93,168.86 R13.1 ; R13.1@501.36,164.43 505.79,160 659.97,160 699.97,200 807.32,200 838.46,168.86 838.46,160.73 R14.1@838.83,160.37 ; R14.1 838.46,157.66 849.2,146.93 R5.2 ; v1@1316.5,1333.5 v1(1315,1335) 1313.5,1336.5 1313.5,1370.98 1589.06,1646.54 R10.2
GND: "Motor 1.1" "Motor 2.1" "Motor 3.1" "Motor 4.1" Battery.1 C1.2 C2.1 C3.1 C4.1 C5.1 C6.1 C7.1 C8.2 C9.1 C10.1 C11.1 C12.1 C13.1 C14.1 C15.1 C16.1 P1.2 P1.10 P4.6 R1.2 R2.2 R3.2 R4.2 R6.1 R7.1 R8.1 R9.1 R15.2 R16.1 SW5.1 SW5.2 U1.22 U1.53 U1.63 U2.2 U2.8 U3.3 U3.4 Y1.2 | length 5783.3
  Top Layer w12: U2.2 586.61,1275 636.61,1325 U2.8 713.47,1325 759.93,1278.54 C10.1 766.46,1280 v1(820,1280) ; C8.2 655.07,1686.46 693.56,1647.97 693.56,1634.59 713.15,1615 Y1.2 748.49,1634.59 842.86,1634.59 862.86,1654.59 960.41,1654.59 v1(1260,1355) ; U1.22 1342.71,1269.81 1260,1352.52 v1(1260,1355) ; C15.1 1632.91,1934.93 1617.41,1919.43 1546.95,1919.43 1453.5,1825.98 1453.5,1754.02 1492.52,1715 U3.3 U3.4 1541.3,1665 1534.11,1657.81 1534.11,1629.11 v1(1260,1355) ; U1.53@1635.02,707.03 U1.53 1635.47,709.08 1680,664.55 v1@1680,661.48 ; v1(1680,665) 1714.49,630.51 C4.1 1765.18,573.79 C5.1 1765.18,559.93 C6.1 1813.92,515.05 1874.49,454.49 C7.1@1874.49,459.49 ; C4.1@1721.45,631.45 C4.1@1723.92,631.45 ; U1.63 1876.28,913.24 1885.71,913.24 1886.42,912.54 v1@1942.54,912.54 ; SW5.1@1931.42,1883.58 SW5.1@1932.05,1883.58 ; v1(1943.77,913.77) 1946.26,911.28 1952.17,911.28 1973.26,890.18 C2.1 2040.55,844.82 C3.1 ; SW5.2 2191.02,1888.58 2250,1829.61 2250,1828.54 C9.1@2246.06,1828.54 ; P1.2 2441.46,320 C1.2@2445,323.54
  Bottom Layer w12: R15.2 709.41,300 749,339.59 807.73,339.59 835,312.32 R16.1@835,300 ; R16.1 973.74,300 1135.08,138.66 R9.1 R8.1 R7.1 R6.1 ; Battery.1 1278.11,1625.43 C16.1 ; R4.2@1447.68,138.66 R4.2 R3.2 R2.2 1838.66,136.34 R1.2 ; v1(1680,665) 2259,86 2291,86 P1.10 2359,154 2359,286 P1.2 ; C14.1@2838.54,310 2841.22,312.68 2841.22,384.88 ; C13.1 2841.22,677.68 2841.22,749.88
NetBattery_3: Battery.3 L6.1 | length 93.5
  Bottom Layer w12: L6.1@1065,1694.53 L6.1@1066.18,1695.71 ; L6.1 1070.47,1700 Battery.3 Battery.3@1158.82,1698.82
NetC2_2: C2.2 U1.62 U3.1 | length 1632.8
  Top Layer w12: v1(1480,1815) 1560.54,1815 1562.04,1813.5 U3.1 ; U1.62 1859.98,885 v1(1910,885) 1912.49,882.51 1922.12,882.51 C2.2
  Bottom Layer w12: v1(1480,1815) 1516.5,1778.5 1516.5,1671.5 1288.5,1443.5 1288.5,1324.02 1727.52,885 v1(1910,885)
NetC3_2: C3.2 L1.2 U1.64 | length 309.1
  Top Layer w12: U1.64 1896.7,937.36 1929.89,937.36 1932.79,940.27 2030.1,940.27 C3.2 2093.06,885.18 L1.2
NetC9_2: C9.2 R10.1 R11.1 SW5.3 SW5.4 | length 352.4
  Top Layer w12: SW5.4 2191.02,1711.42 2250,1770.39 2250,1771.46 C9.2@2246.06,1771.46
  Bottom Layer w12: SW5.3 SW5.4
NetC11_2: C11.2 L2.1 U1.61 | length 1200.4
  Top Layer w12: U1.61@1828.64,871.8 1831.25,871.8 1848.05,855 v1(1880,855)
  Bottom Layer w12: v1(1880,855) 2056.65,855 2627.13,1425.47 L2.1 2770.98,1425.47 C11.2
NetC12_2: C12.2 L3.1 U1.60 | length 1109.2
  Top Layer w12: U1.60 1828.41,827.49 1847.51,827.49 v1(1850,825)
  Bottom Layer w12: v1(1850,825) 2401.65,825 2627.13,1050.47 L3.1 2782.44,1050.47 C12.2
NetC13_2: C13.2 L4.1 U1.59 | length 1083.6
  Top Layer w12: U1.59@1768.64,841.36 U1.59 1808.87,802.49 1817.51,802.49 v1(1820,800)
  Bottom Layer w12: v1(1820,800) 1821.5,798.5 2514.1,798.5 2627.13,685.47 L4.1 2770.98,685.47 C13.2
NetC14_2: C14.2 L5.1 U1.58 | length 1250.5
  Top Layer w12: U1.58 1787.51,779.3 1787.51,772.49 v1(1790,770)
  Bottom Layer w12: v1(1790,770) 2177.6,770 2627.13,320.47 L5.1 2770.98,320.47 C14.2@2781.46,310
NetC16_2: C16.2 L6.2 U3.2 | length 601.6
  Top Layer w12: v1(1480,1765) U3.2
  Bottom Layer w12: L6.2 1205.98,1640.47 C16.2 1221.46,1619.93 1243.04,1598.34 1243.04,1592.63 1251.24,1584.43 1305.84,1584.43 1480,1758.58 v1(1480,1765)
NetCAN_1: CAN.1 R3.1 | length 140.1
  Top Layer w12: CAN.1 1583.66,50 v1(1645,50)
  Bottom Layer w12: R3.1@1576.34,55 1575,53.66 R3.1@1578.66,50 ; R3.1 1583.66,50 v1(1645,50)
NetCAN_2: CAN.2 U1.49 | length 495.4
  Top Layer w12: U1.49 1562.64,603.3 1562.64,151.99 1575.93,138.7 CAN.2@1577.64,138.7
NetDB_1: DB.1 R2.1 | length 134.4
  Top Layer w12: DB.1 1712.32,50 v1(1775,50)
  Bottom Layer w12: R2.1@1711.34,55 R2.1 1713.66,50 v1(1775,50)
NetDB_2: DB.2 U1.50 | length 565.2
  Top Layer w12: U1.50 1568.21,639.66 1603.5,604.36 1603.5,239.53 DB.2@1708.03,135
NetERR_1: ERR.1 R1.1 | length 133.8
  Top Layer w12: ERR.1 1842.32,50 v1(1905,50)
  Bottom Layer w12: R1.1@1841.34,53.66 R1.1 1842.32,50 v1(1905,50)
NetERR_2: ERR.2 U1.51 | length 634.1
  Top Layer w12: U1.51 1590.48,661.93 1623.5,628.91 1623.5,349.53 1838.03,135 ERR.2
NetJ1_3: J1.3 P2.3 U2.7 | length 1391.8
  Top Layer w12: J1.3 105.49,494.51 105.49,1068.44 303.05,1266 336,1266 P2.3@350,1280 ; U2.7 v1(710,1275)
  Bottom Layer w12: P2.3 v1(710,1275) v1@707.51,1277.49 ; P2.3@350,1280 P2.3@352.51,1277.49
NetJ1_4: J1.4 R12.2 U2.6 | length 1265.9
  Top Layer w12: U2.6 v1(710,1225)
  Bottom Layer w12: J1.4 205.49,494.51 205.49,1068.44 247.99,1110.94 265.23,1110.94 322.4,1168.11 R12.2 660,1175 v1(710,1225)
NetJ2_1: J2.1 U1.28 | length 1187.8
  Top Layer w12: J2.1 874.1,1470 U1.28
NetJ2_2: J2.2 U1.27 | length 1249.8
  Top Layer w12: J2.2 258.11,1490 898.64,1490 U1.27
NetJ3_1: J3.1 U1.25 | length 1055.5
  Top Layer w12: J3.1 641.89,1530 947.73,1530 U1.25
NetJ3_2: J3.2 U1.26 | length 1295.1
  Top Layer w12: J3.2 440,1794.12 385,1739.12 385,1635 510,1510 923.19,1510 U1.26
NetL2_2: "Motor 1.3" L2.2 | length 87.9
  Bottom Layer w12: L2.2 2636.18,1485.71 2720.71,1485.71 2721.89,1486.89
NetL3_2: "Motor 2.3" L3.2 | length 90.3
  Bottom Layer w12: L3.2 2637.68,1112.2 2720.43,1112.2 2723.11,1114.88
NetL4_2: "Motor 3.3" L4.2 | length 90.3
  Bottom Layer w12: L4.2 2637.68,747.2 2720.43,747.2 2723.11,749.88
NetL5_2: "Motor 4.3" L5.2 | length 90.3
  Bottom Layer w12: L5.2 2637.68,382.2 2720.43,382.2 2723.11,384.88
NetP1_1: P1.1 U1.57 | length 749
  Top Layer w12: U1.57 2202.27,320 P1.1
NetP1_3: P1.3 U1.55 | length 799.4
  Top Layer w12: U1.55@1681.37,753.63 U1.55 1679.56,752.03 1725,706.59 v1(1725,705)
  Bottom Layer w12: v1(1725,705) 2160,270 P1.3
NetP1_5: P1.5 U1.56 | length 808.4
  Top Layer w12: U1.56 1701.83,767.41 2243.88,225.36 2269.64,225.36 P1.5
NetP1_6: P1.6 P4.5 R11.2 U1.20 | length 2888.8
  Top Layer w12: v1(1350,1370) 1352.49,1367.51 1352.49,1350.56 1387.25,1315.8 U1.20 ; P1.6 2479.96,220 2515.57,255.61 2515.57,882.79 2385,1013.37 P4.5
  Bottom Layer w12: v1(1350,1370) 1595.8,1615.8 2036.39,1615.8 2061.41,1640.82 R11.2@2096.14,1640.82 ; R11.2@2096.14,1646.54 2099.29,1646.54 R11.2 2111.73,1653.27 2378.27,1653.27 P4.5
NetP1_9: P1.9 U1.54 | length 870.9
  Top Layer w12: U1.54 1659.9,731.36 2271.26,120 P1.9
NetP2_2: P2.2 R12.1 | length 101
  Bottom Layer w12: R12.1 250,1177.4 P2.2
NetP4_1: P4.1 U1.2 | length 1047.4
  Top Layer w12: U1.2 1858.21,1068.21 v1(1905,1115)
  Bottom Layer w12: v1(1905,1115) 2429.51,1639.51 2429.51,1778.44 2409.51,1798.44 2409.51,1835.49 P4.1
NetP4_3: P4.3 U1.11 U3.7 | length 1262
  Top Layer w12: U1.11@1658.64,1268.64 U1.11 1907.55,1518.91 ; U3.7 1791.89,1765 1907.55,1649.34 1907.55,1518.91 ; P4.3 2143.91,1518.91 1907.55,1518.91
NetP4_4: P4.4 U1.3 | length 975.5
  Top Layer w12: U1.3 2115.77,1370.79 2115.77,1453.72 2366.56,1704.51 2429.51,1704.51 P4.4
NetPWR_1: PWR.1 R4.1 | length 134.9
  Top Layer w12: PWR.1 1453.66,50 v1(1515,50)
  Bottom Layer w12: R4.1@1451.34,55 R4.1 1453.66,50 v1(1515,50)
NetPWR_2: PWR.2 U1.48 | length 495.8
  Top Layer w12: PWR.2 1437.36,148.98 1437.36,603.3 U1.48
NetR5_1: R5.1 SW1-4.1 SW1-4.2 SW1-4.3 SW1-4.4 | length 280
  Top Layer w12: v1(1105,80) SW1-4.1 SW1-4.2 SW1-4.3 SW1-4.4
  Bottom Layer w12: R5.1 v1(1105,80)
NetR6_2: R6.2 SW1-4.5 U1.47 | length 537.5
  Top Layer w12: SW1-4.5 v1(1330,435) 1330,540.48 U1.47
  Bottom Layer w12: v1(1330,435) 1330,261.34 1346.47,244.87 1346.47,239.94 1365.08,221.34 R6.2
NetR7_2: R7.2 SW1-4.6 U1.46 | length 568
  Top Layer w12: SW1-4.6 v1(1280,435) 1280,535.02 U1.46
  Bottom Layer w12: v1(1280,435) 1280,239.94 1293.61,226.34 1295,226.34 R7.2@1285,236.34
NetR8_2: R8.2 SW1-4.7 U1.45 | length 601.8
  Top Layer w12: SW1-4.7 v1(1230,435) 1230,529.56 U1.45
  Bottom Layer w12: R8.2@1225,236.34 1215,226.34 1216.39,226.34 1230,239.94 v1(1230,435)
NetR9_2: R9.2 SW1-4.8 U1.44 | length 638.8
  Top Layer w12: SW1-4.8 v1(1180,435) 1180,524.1 U1.44
  Bottom Layer w12: R9.2 1144.92,221.34 1163.53,239.94 1163.53,244.87 1180,261.34 v1(1180,435)
NetR13_2: R13.2 SW6.3 SW6.4 | length 391.7
  Top Layer w12: SW6.3 SW6.4
  Bottom Layer w12: SW6.3@340.28,61.42 430,151.14 R13.2
NetR14_2: R14.2 SW7.3 SW7.4 | length 396.4
  Top Layer w12: SW7.3 SW7.4
  Bottom Layer w12: SW7.3 681.81,61.42 771.54,151.14 R14.2
NetR15_1: R15.1 SW6.1 SW6.2 U1.36 | length 1267.8
  Top Layer w12: SW6.1 SW6.2 592.95,293.39 U1.36
  Bottom Layer w12: SW6.1@342.61,244.14 384.54,244.14 431.54,291.14 R15.1
NetR16_2: R16.2 SW7.1 SW7.2 U1.37 | length 1121.8
  Top Layer w12: SW7.1 SW7.2 932.95,588.85 U1.37
  Bottom Layer w12: SW7.1 682.61,244.14 724.54,244.14 771.54,291.14 R16.2
NetU1_13: U1.13 U3.6 | length 535.2
  Top Layer w12: U1.13@1613.19,1313.19 U1.13 1820,1520.44 1820,1686.89 1791.89,1715 U3.6
NetU1_14: U1.14 U3.5 | length 417.2
  Top Layer w12: U1.14@1590.48,1338.07 U1.14 1756.46,1501.44 U3.5 1762.55,1665 U3.5@1769.74,1657.81
NetU1_24: U1.24 Y1.3 | length 551.7
  Top Layer w12: Y1.3 910,1612.27 U1.24
NetU1_30: U1.30 U2.1 | length 860
  Top Layer w12: U2.1 463.39,1325 513.39,1375 880.02,1375 U1.30 U1.30@1164.54,1093.09
NetU1_31: U1.31 U2.4 | length 740.4
  Top Layer w12: U2.4 549.19,1175 619.19,1105 1104.89,1105 1141.69,1068.21 U1.31@1141.79,1068.21
pads on no net: "Motor 1.4" "Motor 1.7" "Motor 1." "Motor 2.4" "Motor 2.7" "Motor 2." "Motor 3.4" "Motor 3.7" "Motor 3." "Motor 4.4" "Motor 4.7" "Motor 4." Battery. Battery.4 Battery.7 J1.2 J1.5 J1.6 J1.7 J1.8 J1.9 J1.10 J1.11 J1.12 J1.13 J1.14 J1.15 J1.16 J2. J3. P1.7 P1.8 P2.1 U1.1 U1.4 U1.5 U1.6 U1.7 U1.8 U1.9 U1.10 U1.12 U1.15 U1.16 U1.17 U1.18 U1.19 U1.23 U1.29 U1.32 U1.33 U1.34 U1.35 U1.38 U1.39 U1.40 U1.41 U1.42 U1.43

## Polygon pours and split planes (outlines as drawn)
+5 on Top Layer "Top Layer-+5" (solid, pour order 166): 0,2000 3000,2000 3000,0 0,0
no net on Top Layer "Top Layer-No Net 5" (solid, pour order 130): 0,2000
no net on Top Layer "Top Layer-No Net" (solid, pour order 108): 5,1995
no net on Top Layer "Top Layer-No Net 3" (solid, pour order 58): 0,1990
no net on Top Layer "Top Layer-No Net 4" (solid, pour order 56): 0,2000
no net on Top Layer "Top Layer-No Net 1" (solid, pour order 2): 225,1975
GND on Bottom Layer "Bottom Layer-GND" (solid, pour order 168): 0,2000 2995,2000 3000,2005 3000,0 0,0
no net on Bottom Layer "Bottom Layer-No Net 2" (solid, pour order 138): 0,2000
no net on Bottom Layer "Bottom Layer-No Net 3" (solid, pour order 122): 0,2000
no net on Bottom Layer "Bottom Layer-No Net 1" (solid, pour order 120): 0,2000
no net on Bottom Layer "Bottom Layer-No Net" (solid, pour order 38): 0,2000
no net on Top Solder (solid): 1860,995 1880,975 1525,620 1505,640
no net on Top Solder (solid): 1510,635
no net on Top Solder (solid): 1520,625
no net on Top Solder (solid): 1125,1020 1480,1375 1495,1360 1140,1005
no net on Top Solder (solid): 1480,625 1125,980 1140,995 1495,640
no net on Top Solder (solid): 1520,1375 1875,1020 1860,1005 1505,1360
no net on Top Solder (solid): 1990,1160
no net on Top Solder (solid): 1870,980
no net on Top Solder (solid): 1870,980
no net on Top Solder (solid): 1870,980

## Silkscreen, mask and mechanical layers (free items; w line width, h text height)
Top Overlay:
  drawing of 139 lines, arcs and shapes, not listed
  text "TR" at 225,1345 h30
  text "Temperature Monitor & Display" at 365,360 h30 r90
  text "Revision 1.0" at 440,360 h30 r90
  text "by Josh Liu" at 515,360 h30 r90
  text "For 8 & 24." at 590,360 h30 r90